# Altium PCB control-lcd.PcbDoc
Units mil, origin at the board's own origin, x right, y up, seen from the top; angles counter-clockwise.
Board outline 3313 x 2255 mil, 2 copper layers (Top Layer, Bottom Layer); 62 components, 66 nets, 308 pads, 238 vias.
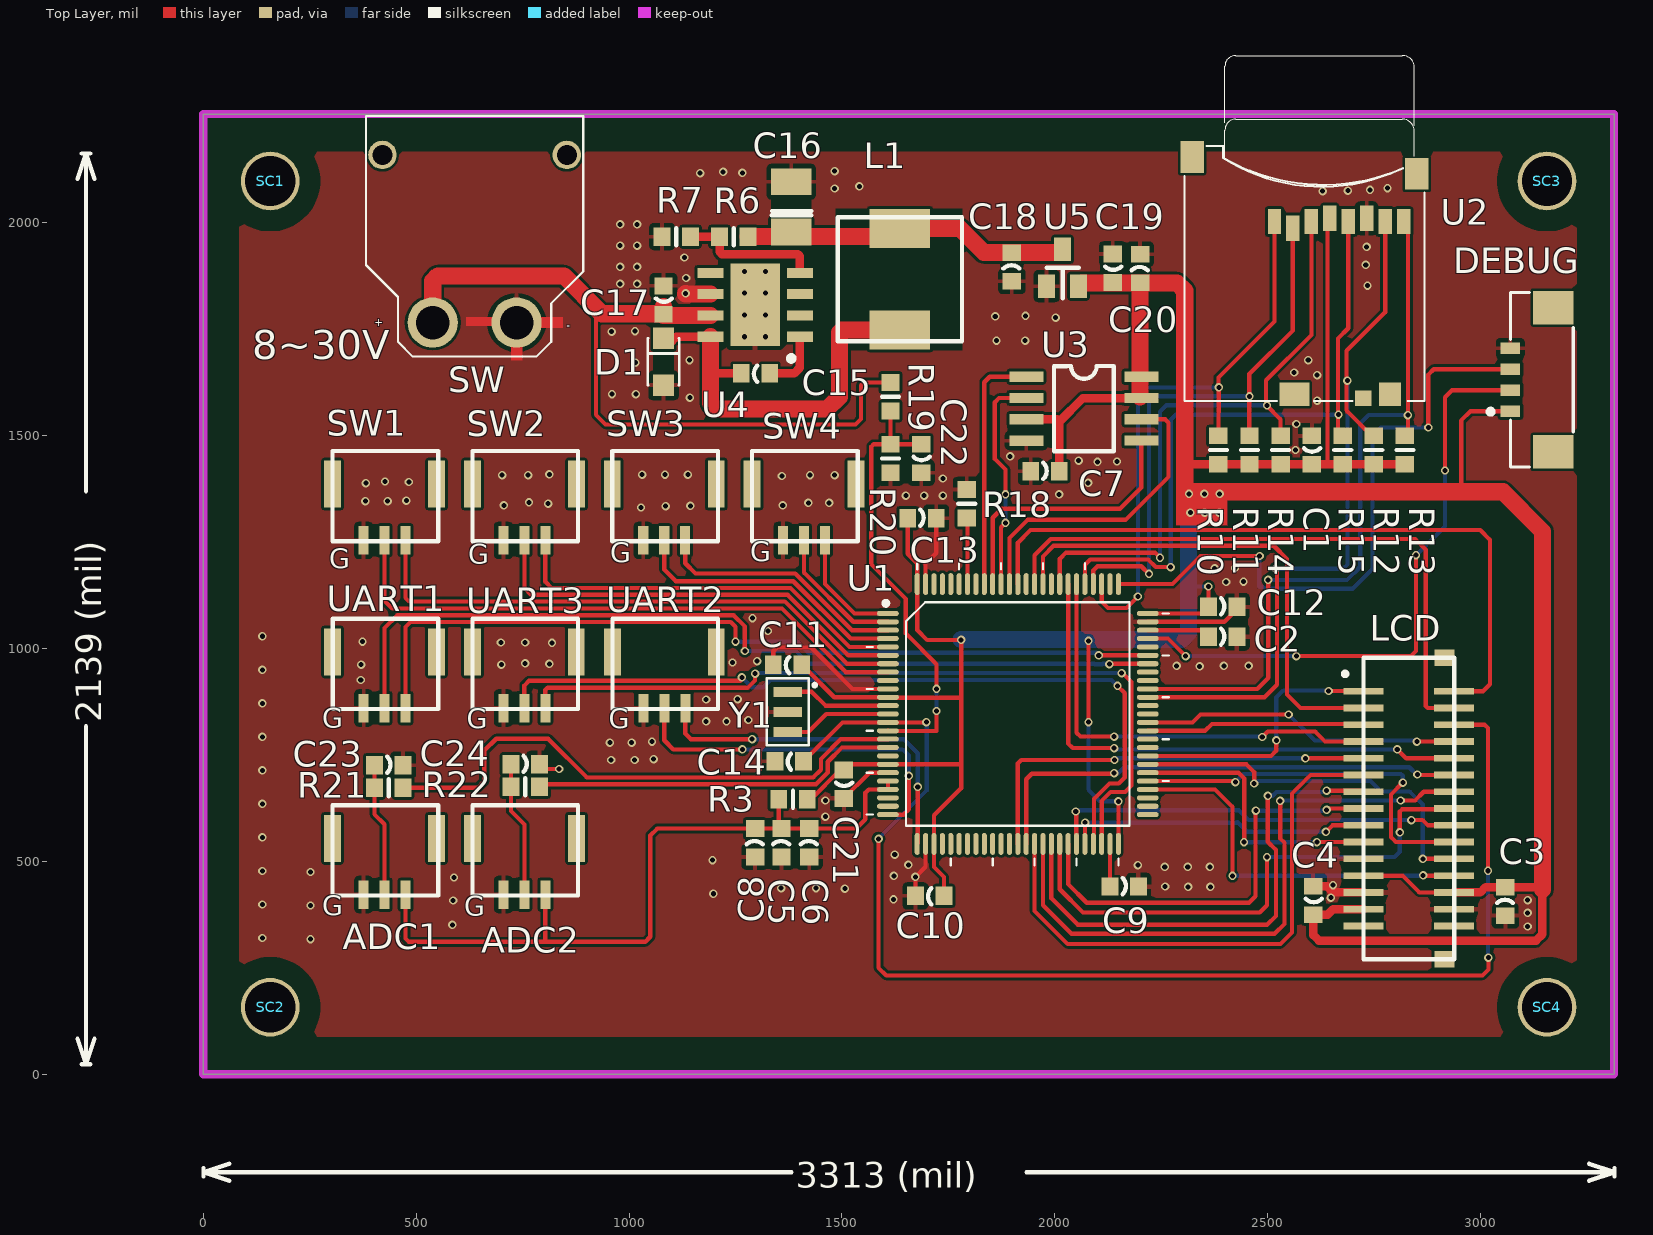
[diagram p0: Top Layer view]
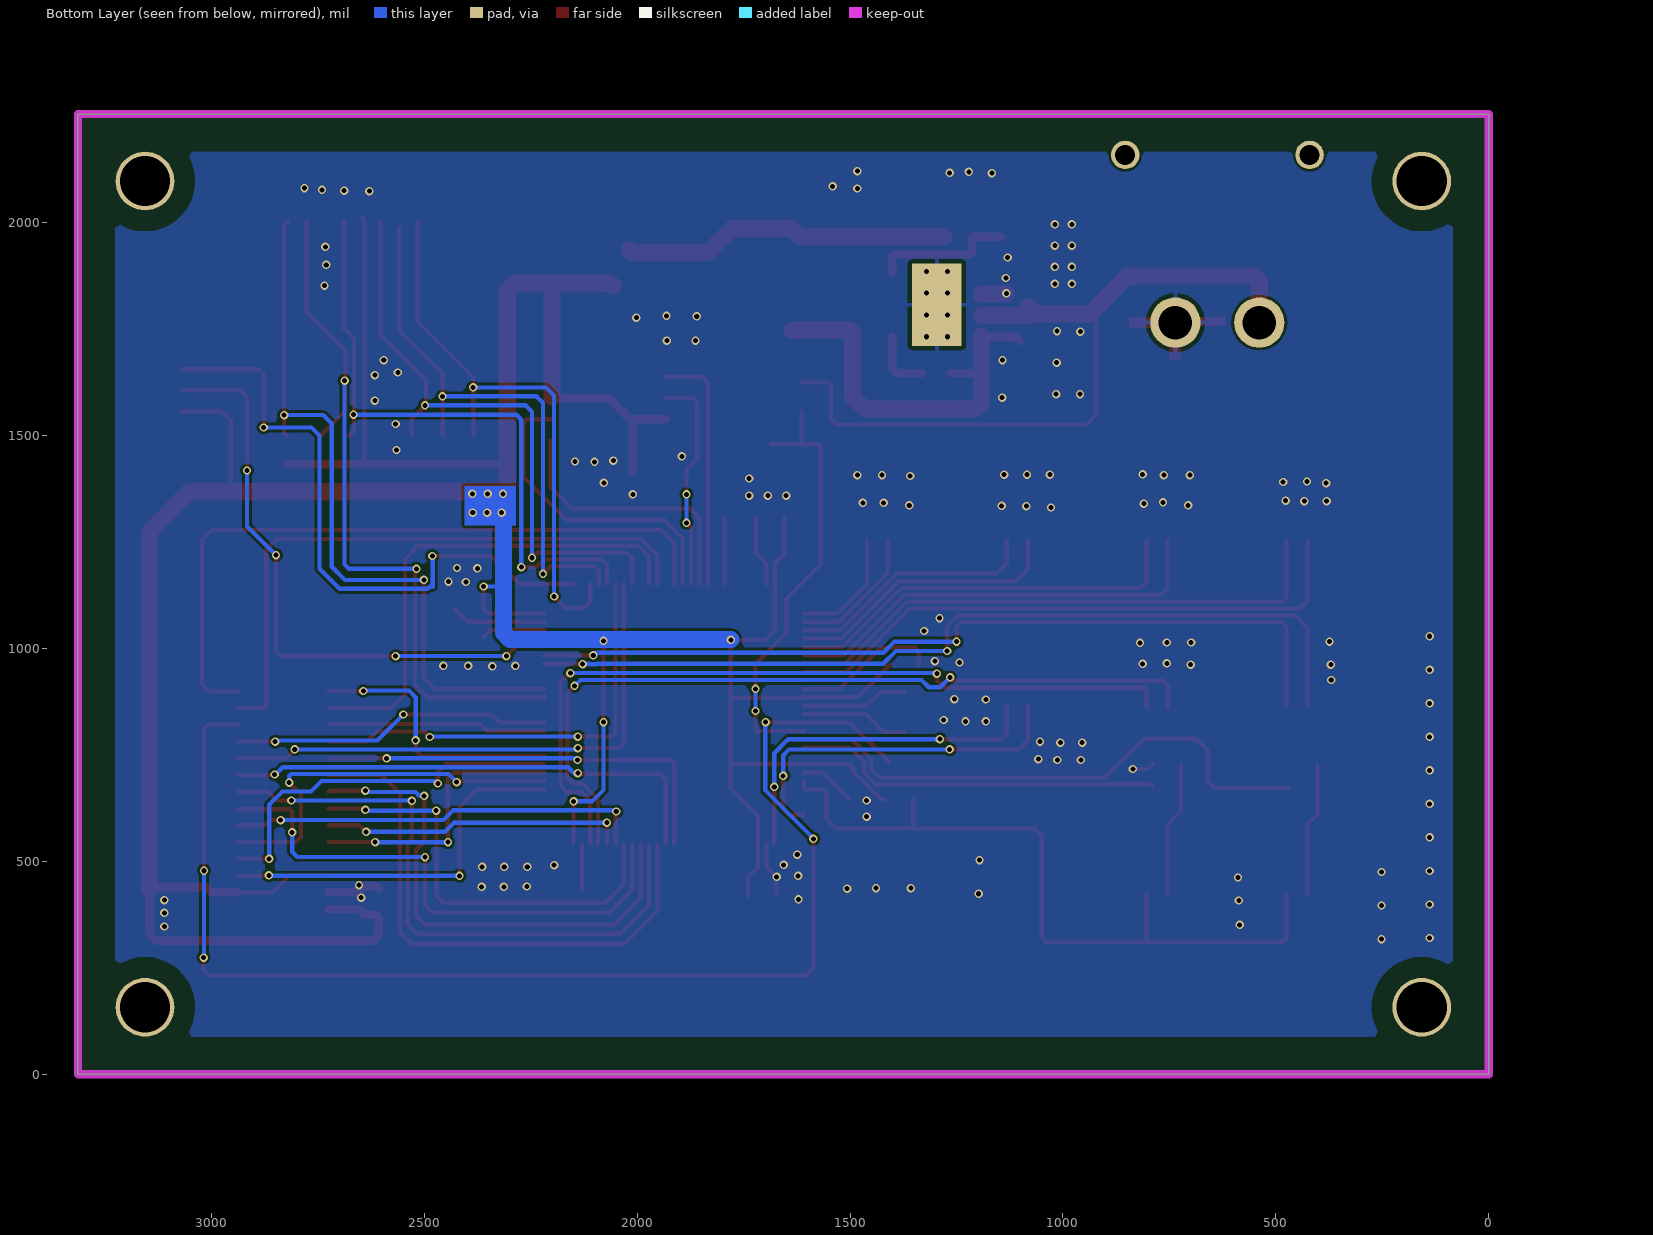
[diagram p1: Bottom Layer view, seen from below]

## Layer stack, top to bottom
Top Solder: solder mask 0.4, Solder Resist, Dk 3.5
Top Layer: signal copper 1.4
Dielectric 1: dielectric 12.6, FR-4, Dk 4.8
Bottom Layer: signal copper 1.4
Bottom Solder: solder mask 0.4, Solder Resist, Dk 3.5

## Board outline
0,0 3313,0 3313,2255 0,2255

## Design rules (kind name [scope] priority, off if disabled: settings)
Clearance [All] p1: gap=6 ignorepadtopadclearanceinfootprint=FALSE
ComponentClearance [All] p1: gap=0 collisioncheckmode=3 verticalgap=0 showdistances=FALSE
HoleToHoleClearance [All] p1: gap=0 allowstackedmicrovias=TRUE
MinimumSolderMaskSliver [All] p1: minsoldermaskwidth=0
PolygonConnect PolygonConnect_1 [All vs IsVia] p1: connectstyle=Direct reliefconductorwidth=10 reliefentries=4 polygonreliefangle="90 Angle" airgapwidth=10
PolygonConnect [All] p2: connectstyle=Relief reliefconductorwidth=10 reliefentries=4 polygonreliefangle="90 Angle" airgapwidth=10
RoutingVias [All] p1: holewidth=28 width=50 viastyle="Through Hole" minholewidth=11.81 minwidth=19.68 maxholewidth=28 maxwidth=50
SilkToSilkClearance [All] p1: silktosilkclearance=0
SilkToSolderMaskClearance [IsPad] p1: minsilkscreentomaskgap=0 clearancetoexposedcopper=TRUE
SolderMaskExpansion [All] p1: expansion=4
Width [All] p1: maxlimit=60 minlimit=6 preferedwidth=15
25 further rules are at their usual default settings.

## Components (designator, comment, footprint, x,y, rotation, side; value= is the part's Value field where it differs from the comment)
ADC1 "Header 3" 3PJST1.25 548,554 r180 top
ADC2 "Header 3" 3PJST1.25 876.35,554 r180 top
C1 "100n" C0603 2603,1466 r90 top
C2 "225" C0603 2394,1027 r180 top
C3 "100n" C0603 3058,406 r270 top
C4 "100n" C0603 2607,408 r90 top
C5 "100n" C0603 1358,544 r270 top
C6 "10uf" C0603 1423,544 r270 top
C7 "100n" C0603 1977,1416 r180 top
C8 "225" C0603 1296,544 r270 top
C9 "225" C0603 2163,441 r180 top
C10 "100n" C0603 1706,419 r0 top
C11 "100n" C0603 1372,962 r0 top
C12 "100n" C0603 2394,1098 r180 top
C13 "100n" C0603 1688,1306 r180 top
C14 "100n" C0603 1376.54,735 r0 top
C15 "100n" C0603 1297,1646 r0 top
C16 "220u/20V" SMC_B 1381,2037 r90 top
C17 "10uf" C0603 1081,1818 r90 top
C18 "100n" C0603 1899,1896 r270 top
C19 "100n" C0603 2136,1893 r90 top
C20 "10UF" C0603 2200,1892 r270 top
C21 "100n" C0603 1504,681 r90 top
C22 "0.1uF" C0603 1686,1446 r90 top
C23 "0.1uF" C0603 436,726 r180 top
C24 "0.1uF" C0603 756,728 r180 top
D1 "PMEG3010ER" "SOD123W-DIODE - AK" 1081,1673 r90 top
DEBUG "CON4" DF13-1.25-4A 3120,1631 r90 top
L1 "18uH" L7_7_4 1636,1867 r90 top
LCD "Header 15X2A" DIP1.0X30 2725,899.59 r270 top locked
R3 "10R" R0603 1385,646 r0 top
R6 "10k" R0603 1246,1967 r0 top
R7 "3.24k" R0603 1111,1967 r180 top
R10 "4.7K" R0603 2384,1466 r270 top
R11 "4.7K" R0603 2457,1466 r270 top
R12 "4.7K" R0603 2749,1466 r270 top
R13 "4.7K" R0603 2822,1466 r270 top
R14 "4.7K" R0603 2530,1466 r270 top
R15 "4.7K" R0603 2676,1466 r270 top
R18 "4.7K" R0603 1793,1340 r90 top
R19 "10K" R0603 1614,1591 r270 top
R20 "10K" R0603 1614,1446 r270 top value=1K
R21 "10K" R0603 436,673 r180 top value=100R
R22 "10K" R0603 756,675 r180 top value=100R
SC1 "M3" SCRREW_M3#1 132,2083 r0 top
SC2 "M3" SCRREW_M3#2 125,109 r0 top
SC3 "M3" SCRREW_M3#3 3190,2081 r0 top
SC4 "M3" SCRREW_M3#4 3169,157.48 r0 top
SW "TX30" TX30-m 637.46,1765.3 r0 top locked
SW1 "Header 3" 3PJST1.25 548,1385.89 r180 top
SW2 "Header 3" 3PJST1.25 876.35,1385.89 r180 top
SW3 "Header 3" 3PJST1.25 1204.7,1385.89 r180 top
SW4 "Header 3" 3PJST1.25 1533.05,1385.89 r180 top
U1 "STM32F407_100P" ST_LQFP100 1913,846 r0 top locked
U2 "microSD" MICROSD1 2586.21,1870.79 r0 top
U3 "W25Q128" SOIC-8 1933,1638.06 r0 top
U4 "TPS5430DDA" SOIC 1296,1807 r180 top
U5 "3.3V" SOT23 2018,1894 r0 top
UART1 "Header 3" 3PJST1.25 548.05,991.89 r180 top
UART2 "Header 3" 3PJST1.25 1205.05,991.89 r180 top
UART3 "Header 3" 3PJST1.25 876.26,991.89 r180 top
Y1 "CSTCE8M00G55R0" CRYSMD3.2X1.3 1373,851 r270 top

## Footprints (in the part's own frame and the unit in brackets; to place one, negate y for a bottom-side part, rotate by r counter-clockwise, add the part's x,y. Pads: shape width x height; smd on the part's side, far side on the other; paste and mask are expansions set on the pad)
3PJST1.25 [mm]
  rect 1x2.8 smd: 0(0,0) 0(6.2,0)
  rect 0.6x1.7 smd: 1(1.85,3.35) 2(3.1,3.35) 3(4.35,3.35)
  silkscreen extent -0.1,-1.98 6.2,3.4
C0603 [mm] "C0603"
  rect 1x1.1 smd: 1(-0.85,0) 2(0.85,0)
  Top Layer pour cut-out: -0.356,0.533 -0.356,-0.533 0.356,-0.533 0.356,0.533
  silkscreen extent -0.1,-0.51 0.1,0.46
CRYSMD3.2X1.3 [mm]
  rect 0.6x1.7 smd: 1(-1.2,0) 2(0,0) 3(1.2,0)
  Top Layer pour cut-out: -2.007,1.245 -0.381,1.245 -0.381,-1.27 -2.007,-1.27
  Top Layer pour cut-out: 1.981,1.245 0.406,1.245 0.406,-1.245 1.956,-1.245 1.981,-1.219
  silkscreen extent -2,-1.25 2,1.7
DF13-1.25-4A [mm] "佳能"
  rect 0.7x1.18 smd: 1(-1.875,1.28) 2(-0.625,1.28) 3(0.625,1.28) 4(1.875,1.28)
  rect 2x2.4 smd: NC(-4.3,-1.28) NC(4.3,-1.28)
  silkscreen extent -5.21,-2.48 5.21,2.61
DIP1.0X30 [mm]
  rect 0.4x2.4 smd: 1(0,5.39) 2(1,5.39) 3(2,5.39) 4(3,5.39) 5(4,5.39) 6(5,5.39) 7(6,5.39) 8(7,5.39) 9(8,5.39) 10(9,5.39) 11(10,5.39) 12(11,5.39) 13(12,5.39) 14(13,5.39) 15(14,5.39) 16(0,0) 17(1,0) 18(2,0) 19(3,0) 20(4,0) 21(5,0) 22(6,0) 23(7,0) 24(8,0) 25(9,0) 26(10,0) 27(11,0) 28(12,0) 29(13,0) 30(14,0)
  rect 1x1.2 smd: ""(-2,4.816) ""(15.985,4.816)
  Top Layer pour cut-out: -1.88,5.309 -1.88,0.14 -1.968,0.051 10.884,0.051 10.884,5.283 10.858,5.309
  silkscreen extent -2,-1.23 15.98,5.4
L7_7_4 [mm]
  rect 2.35x3.6 smd: 1(3.025,0) 2(-3.025,0)
  Top Layer pour cut-out: -4.242,3.835 -4.242,-3.708 4.216,-3.708 4.216,3.835
  silkscreen extent -3.7,-3.7 3.7,3.7
MICROSD1 [mm]
  rect 0.8x1.5 smd: 1(-1.79,3.346) 2(-0.69,2.946) 3(0.41,3.346) 4(1.51,3.545) 5(2.61,3.346) 6(3.71,3.545) 7(4.81,3.346) 8(5.91,3.346)
  rect 1.4x1.9 smd: NC(-6.7,7.195) NC3(6.7,6.195)
  rect 1.8x1.4 smd: NC1(-0.6,-6.954)
  rect 1x0.9 smd: NC2(3.497,-7.195)
  rect 1.3x1.4 smd: NC2(5.1,-6.954)
  silkscreen extent -7.15,-7.35 7.15,13.25
R0603 [mm] "R0603"
  rect 1x1.1 smd: 1(-0.85,0) 2(0.85,0)
  Top Layer pour cut-out: -0.356,0.533 -0.356,-0.533 0.356,-0.533 0.356,0.533
  silkscreen extent 0,-0.51 0,0.51
SCRREW_M3#1 [mm]
  round 3.5 hole 3: 0(0.647,0.369)
SCRREW_M3#2 [mm]
  round 3.5 hole 3: 0(0.825,1.231)
SCRREW_M3#3 [mm]
  round 3.5 hole 3: 0(-0.876,0.42)
SCRREW_M3#4 [mm]
  round 3.5 hole 3: 0(-0.343,0)
SMC_B [mil] "SMC_B"
  rect 62.99x94.49 smd: +(-59.06,0) -(59.06,0)
  Top Layer pour cut-out: -28,47 -28,-47 28,-47 28,47
  silkscreen extent -20,-48 -10,46
"SOD123W-DIODE - AK" [mil] "SOD123W-DIODE"
  rect 50x50 smd: A(-55.12,0) K(55.12,0)
  Top Layer pour cut-out: -30,25 -30,-25 30,-25 30,25
  silkscreen extent -55,-37 55,37
SOIC [mm]
  rect 1.55x0.6 smd: 1(-2.667,1.905) 2(-2.667,0.635) 3(-2.667,-0.635) 4(-2.667,-1.905) 5(2.667,-1.905) 6(2.667,-0.635) 7(2.667,0.635) 8(2.667,1.905)
  rect 2.95x4.9 smd: 9(0,0)
  rect 2.95x4.9 smd far side: 9(0,0)
  silkscreen extent -2.29,3.07 -2.03,3.33
SOIC-8 [mil]
  rect 80x24 smd: 1(0,0) 2(0,-50.06) 3(0,-100.06) 4(0,-150.06) 5(270,-150) 6(270,-100) 7(270,-50) 8(270,0)
  silkscreen extent 65,-175 205,25
SOT23 [mm] "SOT23"
  rect 1x1.4 smd: 1(-0.95,-1.1) 2(0.95,-1.1) 3(0,1.1)
  silkscreen extent -0.94,-1.82 0.97,0
ST_LQFP100 [mm]
  oval 1.3x0.3 smd: 1(-7.75,6) 2(-7.75,5.5) 3(-7.75,5) 4(-7.75,4.5) 5(-7.75,4) 6(-7.75,3.5) 7(-7.75,3) 8(-7.75,2.5) 9(-7.75,2) 10(-7.75,1.5) 11(-7.75,1) 12(-7.75,0.5) 13(-7.75,0) 14(-7.75,-0.5) 15(-7.75,-1) 16(-7.75,-1.5) 17(-7.75,-2) 18(-7.75,-2.5) 19(-7.75,-3) 20(-7.75,-3.5) 21(-7.75,-4) 22(-7.75,-4.5) 23(-7.75,-5) 24(-7.75,-5.5) 25(-7.75,-6) 51(7.75,-6) 52(7.75,-5.5) 53(7.75,-5) 54(7.75,-4.5) 55(7.75,-4) 56(7.75,-3.5) 57(7.75,-3) 58(7.75,-2.5) 59(7.75,-2) 60(7.75,-1.5) 61(7.75,-1) 62(7.75,-0.5) 63(7.75,0) 64(7.75,0.5) 65(7.75,1) 66(7.75,1.5) 67(7.75,2) 68(7.75,2.5) 69(7.75,3) 70(7.75,3.5) 71(7.75,4) 72(7.75,4.5) 73(7.75,5) 74(7.75,5.5) 75(7.75,6)
  oval 0.3x1.3 smd: 26(-6,-7.75) 27(-5.5,-7.75) 28(-5,-7.75) 29(-4.5,-7.75) 30(-4,-7.75) 31(-3.5,-7.75) 32(-3,-7.75) 33(-2.5,-7.75) 34(-2,-7.75) 35(-1.5,-7.75) 36(-1,-7.75) 37(-0.5,-7.75) 38(0,-7.75) 39(0.5,-7.75) 40(1,-7.75) 41(1.5,-7.75) 42(2,-7.75) 43(2.5,-7.75) 44(3,-7.75) 45(3.5,-7.75) 46(4,-7.75) 47(4.5,-7.75) 48(5,-7.75) 49(5.5,-7.75) 50(6,-7.75) 76(6,7.75) 77(5.5,7.75) 78(5,7.75) 79(4.5,7.75) 80(4,7.75) 81(3.5,7.75) 82(3,7.75) 83(2.5,7.75) 84(2,7.75) 85(1.5,7.75) 86(1,7.75) 87(0.5,7.75) 88(0,7.75) 89(-0.5,7.75) 90(-1,7.75) 91(-1.5,7.75) 92(-2,7.75) 93(-2.5,7.75) 94(-3,7.75) 95(-3.5,7.75) 96(-4,7.75) 97(-4.5,7.75) 98(-5,7.75) 99(-5.5,7.75) 100(-6,7.75)
  silkscreen extent -9.02,-9.02 9.02,9.02
TX30-m [mm]
  round 1.7 hole 1.2: 0(-5.5,10) 0(5.5,10)
  round 3 hole 2: 1(-2.5,0) 2(2.5,0)
  silkscreen extent -6.48,-2.03 6.48,12.32

## Part data
ADC1 ADC2 SW1 SW2 SW3 SW4 UART1 UART2 UART3: "Header, 3-Pin", LatestRevisionDate=17-Jul-2002, LatestRevisionNote="Re-released for DXP Platform.", Publisher="Altium Limited"
C1 C3 C4 C5 C6 C7 C10 C11 C12 C13 C14 C15 C17 C18 C19 C21: library part C-EUC0603, "CAPACITOR, European symbol"
C2 C8 C9: library part C
C16: library part CPOL-EUSMCB, "POLARIZED CAPACITOR, European symbol", +=+
C20 C22 C23 C24: library part Cap, "Capacitor", LatestRevisionDate=17-Jul-2002, LatestRevisionNote="Re-released for DXP Platform.", PackageReference=RAD-0.3, Published=8-Jun-2000, Publisher="Altium Limited"
D1: library part DIODE-SCHOTTKYSOD123-W
L1: library part L-EU_L0603
LCD: "Header, 15-Pin, Dual row", LatestRevisionDate=17-Jul-2002, LatestRevisionNote="Re-released for DXP Platform.", Publisher="Altium Limited"
R3: library part R
R6 R7 R10 R11 R12 R13 R14 R15 R18: library part R-EU_R0603, "RESISTOR, European symbol"
R19 R20 R21 R22: library part Res2, "Resistor", LatestRevisionDate=17-Jul-2002, LatestRevisionNote="Re-released for DXP Platform.", PackageReference=AXIAL-0.4, Published=8-Jun-2000, Publisher="Altium Limited"
SC1 SC2 SC3 SC4: library part Screw_M3, "Screw"
SW: library part "Header 2", "Header, 2-Pin", LatestRevisionDate=17-Jul-2002, LatestRevisionNote="Re-released for DXP Platform.", Publisher="Altium Limited"
U3: library part W25X16, "W25X16;SST25VF016;MX25L1605"
U5: library part XC6206
Y1: library part XTAL-3

## Via types
v1: diameter 19.68, hole 11.81, Top Layer to Bottom Layer, tented both sides, 238 vias

## Nets (pads, with @x,y where several pads share a name; then routed paths per layer and width w, separated by ;. In a path a pad name is that pad's centre, name@x,y a point inside that pad or via, vN(x,y) a via of type N, cw(c..) or ccw(c..) an arc to the next point about the centre after c; other vN are vias at no path point)
ADC1: R21.1 U1.16 | length 1318
  Top Layer w10: R21.1 645,673 660,688 660,760 688,788 810,788 901,697 1432.37,697 1450.64,715.27 1450.64,740.63 1496.96,786.95 U1.16
ADC2: R22.1 U1.17 | length 871.5
  Top Layer w10: R22.1 795.46,681 1439,681 1466.64,708.64 1466.64,734 1499.9,767.26 U1.17
ADC_C: C22.2 R19.2 R20.1 U1.15 | length 1039.9
  Top Layer w10: U1.15 1608.35,806.16 1721.84,806.16 1722,806.31 v1(1722,853) ; R20.1 1574.46,1479.46 1569,1474 1569,1197 1650,1116 1650,1035 1722,963 v1(1722,905) ; R19.2 1614,1484.46 1619,1479.46 C22.2
  Bottom Layer w10: v1(1722,853) v1(1722,905)
F_CS: U1.92 U3.1 | length 578.2
  Top Layer w10: U1.92 1834.26,1625.26 1847.06,1638.06 U3.1
FSMC_A16: LCD.16 U1.58 | length 644.2
  Top Layer w10: U1.58 2507.58,747.58 2520,760 v1(2520,784) ; v1(2643,900) 2724.59,900 LCD.16
  Bottom Layer w10: v1(2520,784) 2520,885 2536,901 2642,901 v1(2643,900)
FSMC_D0: LCD.18 U1.61 | length 514.4
  Top Layer w10: U1.61 2352.63,806.63 2368.84,822.84 2723.01,822.84 LCD.18
FSMC_D1: LCD.4 U1.62 | length 752.3
  Top Layer w10: U1.62 2323.32,826.32 2342,845 v1(2549,845) ; v1(2850,781) 2850.48,781.48 LCD.4
  Bottom Layer w10: v1(2549,845) 2610.16,783.84 v1@2850,783.84
FSMC_D2: LCD.19 U1.81 | length 1041.9
  Top Layer w10: U1.81 2050.8,802.2 2060,793 v1(2139,793) ; v1(2487,792) 2499.84,804.84 2611.16,804.84 2634.52,781.48 LCD.19
  Bottom Layer w10: v1(2139,793) v1@2487,793
FSMC_D3: LCD.5 U1.82 | length 1294.7
  Top Layer w10: U1.82 2031.11,776.89 2042,766 v1(2139,766) ; v1(2804,763) 2824.89,742.11 LCD.5
  Bottom Layer w10: v1(2139,766) 2142,763 v1(2804,763)
FSMC_D4: LCD.20 U1.38 | length 1009.1
  Top Layer w10: U1.38 1913,730 1921,738 v1(2140,738) v1@2143,738 ; v1(2588,742) 2702.89,742 2703,742.11 LCD.20
  Bottom Layer w10: v1(2140,738) 2144,742 v1(2588,742)
FSMC_D5: LCD.6 U1.39 | length 1184.7
  Top Layer w10: U1.39 1932.69,692.69 1945.84,705.84 2143.16,705.84 2142,707 v1(2139,707) ; v1(2851,704) 2852.26,702.74 LCD.6
  Bottom Layer w10: v1(2139,707) 2148,707 2162,721 2832,721 2850,703 v1(2851,704)
FSMC_D6: LCD.21 U1.40 | length 1317.8
  Top Layer w10: U1.40 1952.37,383.63 2030,306 2530,306 2556.74,332.74 2556.74,659.48 2600,702.74 LCD.21
FSMC_D7: LCD.7 U1.41 | length 1458.3
  Top Layer w10: U1.41 1972.06,396.94 2039,330 2516,330 2539,353 2539,544 2529,554 v1(2529,642) ; v1(2812,643) 2846,643 2866.37,663.37 LCD.7
  Bottom Layer w10: v1(2529,642) 2530,643 v1(2812,643)
FSMC_D8: LCD.22 U1.42 | length 1239.8
  Top Layer w10: U1.42 1991.74,413.26 2054,351 2498,351 2519,372 2519,527 ; v1(2500,654) 2500,546 ; v1(2638,666) 2722.37,666 LCD.22 ; 2500,546 2519,527 ; 2500,546 2519,527
  Bottom Layer w10: v1(2500,654) 2511.52,654 2520.37,662.84 2635.84,662.84 2637,664 2638,663 v1(2638,666)
FSMC_D9: LCD.8 U1.43 | length 1277.6
  Top Layer w10: U1.43 2011.43,434.57 2066,380 2481,380 2498,397 v1(2498,510) ; v1(2810,568) 2810,617 2815.16,622.16 2935.35,622.16 LCD.8
  Bottom Layer w10: v1(2498,510) 2798,510 2810,522 v1(2810,568)
FSMC_D10: LCD.23 U1.44 | length 1017.3
  Top Layer w10: U1.44 2031.11,446.89 2075,403 2456,403 2471,418 v1@2471,622 ; v1(2638,621) 2641,624 LCD.23
  Bottom Layer w10: v1(2472,619) 2636,619 v1(2638,621)
FSMC_D11: LCD.9 U1.45 | length 987.1
  Top Layer w10: v1(2049,617) v1@2051,617 ; v1@2050.16,617 2050.16,541.52 U1.45 ; v1(2837,597) 2863.63,597 2876,584.63 LCD.9
  Bottom Layer w10: v1(2049,617) 2049,617.69 2046.84,619.84 2432.16,619.84 2455,597 v1(2837,597)
FSMC_D12: LCD.24 U1.46 | length 716.6
  Top Layer w10: U1.46 v1@2070.48,587.48 ; v1(2636.52,569.48) 2651.67,584.63 LCD.24
  Bottom Layer w10: v1(2071,591) 2428,591 2429,592 2451.52,569.48 v1(2636.52,569.48)
FSMC_D13: LCD.10 U1.55 | length 918
  Top Layer w10: U1.55 2421.48,688.52 v1(2424,686) ; v1(2817,685) 2789.16,657.16 2789.16,556.84 2800.74,545.26 LCD.10
  Bottom Layer w10: v1(2424,686) 2443,705 2813,705 2817,701 v1(2817,685)
FSMC_D14: LCD.25 U1.56 | length 663.1
  Top Layer w10: U1.56 2431.27,708.21 2444.84,694.63 2444.84,545.84 v1(2444,545) ; v1@2615.26,545.26 LCD.25
  Bottom Layer w10: v1(2444,545) v1(2615,545)
FSMC_D15: LCD.11 U1.57 | length 904.5
  Top Layer w10: U1.57@2220.12,727.89 2450,727.89 2468,709.89 v1(2468,683) ; v1(2864,506) 2937.09,506 LCD.11
  Bottom Layer w10: v1(2468,683) 2474,689 2741,689 2766,664 2766.16,664.16 2833.16,664.16 2864,633.31 v1(2864,506)
FSMC_NE1: LCD.1 U1.88 | length 1658.4
  Top Layer w10: U1.88 1913,1248 1943,1278 2999,1278 3022,1255 3022,916 3005.59,899.59 LCD.1
FSMC_NOE: LCD.17 U1.85 | length 1172.2
  Top Layer w10: U1.85 1972.06,1216.06 1997,1241 2514,1241 2545,1210 2545,892 2576.78,860.22 LCD.17
FSMC_NWE: LCD.2 U1.86 | length 1447.8
  Top Layer w10: U1.86 1952.37,1219 1990.37,1257 2846,1257 2871,1232 2871,865 2875.78,860.22 LCD.2
GND: ADC1.3 ADC2.3 C1.2 C2.1 C3.2 C4.2 C5.2 C6.2 C7.2 C8.2 C9.1 C10.1 C11.1 C12.1 C13.1 C14.1 C16.- C17.2 C18.2 C19.2 C20.1 C21.1 C22.1 C23.1 C24.1 D1.A DEBUG.4 LCD.14 LCD.26 LCD.28 R7.2 R18.2 R20.2 SW1.3 SW2.3 SW3.3 SW4.3 SW.2 U1.10 U1.20 U1.27 U1.74 U1.99 U2.6 U3.4 U4.6 U4.9 U5.1 UART1.3 UART2.3 UART3.3 Y1.2 | length 1230.5
  Top Layer w10: C24.1 800.46,717 v1(836,717) ; C11.1 1338.54,993.54 1347,1002 1428,1002 1524.94,905.06 U1.10 ; C21.1 1564.67,708.21 U1.20 ; C10.1 v1(1672.54,463.54) 1696.47,487.47 U1.27 ; U1.99 1696.47,1199.47 1721.46,1224.46 C13.1 ; U1.74 2398,1062.54 C12.1@2427.46,1092
  Top Layer w20: C4.2@2607,435.46 2613,441.46 2639.54,441.46 2653.85,427.15 LCD.28
  Top Layer w40: v1(1133,1834) 1134,1833 1133,1832 U4.6
  other v1: 252,317.52 139,320 3110,347 585,351 3110,379 252,396.26 139,398.74 587,408 3110,409 1621,411 2648,415 1198,424 1507,436 1357,437 1439,437 2313,440 2365,440 2259,441 2653,444 589,462 1622,466 252,475 139,477.48 2258,487 2312,487 2364,487 2195,491 1656,492 1196,503 1624,516 139,556.22 1461,605 139,634.96 1461,643 139,713.7 958,738 1013,738 1058,740 955,779 1006,779 1054,781 139,792.44 1181,829 1229,829 1280,832 139,871.18 1181,880 1255,881 370,926 139,949.92 2340,958 2286,959 2397,959 2455,959 371,962 700,962 813,964 756,965 1243,967 1301,970 819,1013 699,1014 756,1014 374,1016 139,1028.66 1326,1041 1290,1071 2402,1156 2443,1157 2375,1188 2423,1189 1028,1331 1086,1334 1144,1335 706,1336 1361,1336 810,1340 1421,1342 1470,1342 765,1343 381,1346 433,1346 477,1347 1650,1359 1693,1359 1737,1359 2010,1362 382,1388 2078,1389 483,1391 427,1392 1737,1399 1359,1405 702,1407 763,1407 1425,1407 1483,1407 1031,1408 1084.5,1408 1138,1408 813,1409 2100,1438 2146,1439 2056,1441 1895,1451 2565,1466 2567,1527 2616,1582 1143,1589 960,1597 1016,1597 2616,1642 2562,1648 1015,1671 1142,1677 2595,1677 1863,1723 1930,1723 1271,1732 1321,1732 959,1744 1014,1745 2002,1777 1860,1780 1931,1781 1271,1783.18 1321,1783.18 1271,1834.36 1321,1834.36 2734,1852 979,1856 1019,1856 1134,1870 1271,1885.54 1321,1885.54 979,1896 1019,1896 2730,1901 1130,1918 2732,1943 979,1946 1019,1946 979,1996 1019,1996 2629,2074 2688,2075 2740,2077 1483,2080 2781,2081 1541,2085 1167,2116 1266,2117 1221,2119 1483,2121
LCD_BL: LCD.12 U1.54 | length 905.6
  Top Layer w10: U1.54 2376.16,668.84 2417,628 v1(2417,466) ; v1(2865,467) 2862,467 2861.52,466.52 LCD.12
  Bottom Layer w10: v1(2417,466) 2864,466 v1(2865,467)
NetADC1_2: ADC1.2 C23.2 R21.2 | length 313.6
  Top Layer w10: C23.2 R21.2 402.54,610.46 425.95,587.05 ADC1.2
NetADC2_2: ADC2.2 C24.2 R22.2 | length 319
  Top Layer w10: C24.2 R22.2 722.54,618.46 754.3,586.7 ADC2.2
NetC2_2: C2.2 U1.73 | length 149
  Top Layer w10: U1.73 2344.69,1042.85 C2.2
NetC9_2: C9.2 U1.49 | length 109.6
  Top Layer w10: U1.49 2129.54,431.92 C9.2@2130,431.46
NetC15_1: C15.1 D1.K L1.2 U4.8 | length 928.8
  Top Layer w20: D1.K@1101.12,1722 1111.12,1732 U4.8 ; 1201,1646 C15.1
  Top Layer w40: U4.8 1191,1576 1205,1562 1465,1562 1494,1591 1494,1742 1499.91,1747.91 L1.2
NetC15_2: C15.2 U4.1 | length 148.9
  Top Layer w20: C15.2 1388,1646 1401,1659 U4.1
NetR6_1: R6.1 R7.1 U4.4 | length 335.4
  Top Layer w20: R7.1 R6.1 1212.54,1931.46 1218,1926 1396,1926 1401,1921 U4.4
NetR18_1: R18.1 U1.94 | length 155.4
  Top Layer w10: U1.94 R18.1@1794.89,1306.54
NetU1_12: U1.12 Y1.1 | length 248.4
  Top Layer w10: Y1.1 1428.76,898.24 1461.31,865.69 U1.12
NetU1_13: U1.13 Y1.3 | length 252.4
  Top Layer w10: Y1.3 1420.76,803.76 1463,846 U1.13
REST1: C14.2 LCD.3 U1.14 | length 3046.1
  Top Layer w10: C14.2 1501.32,826.32 U1.14 1697.68,826.32 1698,826.63 v1(1698,827) ; v1(1586,553) 1586,250 1604,232 3004,232 3018,246 v1(3018,274) ; LCD.3 3009.15,820.85 3017,813 v1(3017,478)
  Bottom Layer w10: v1(1586,553) 1586,553.52 1698.84,666.37 1698.84,826.16 v1(1698,827) ; v1(3017,478) 3017,275 v1(3018,274)
RX1: U1.70 UART1.1 | length 1984.8
  Top Layer w10: UART1.1@475.17,866.11 475.17,1050.17 487,1062 1239,1062 1250,1051 v1(1250,1016) ; v1(2103,984) 2103.2,983.8 2119.32,983.8 2119.37,983.84 U1.70 U1.70
  Bottom Layer w10: v1(1250,1016) 1396,1016 1422,990 2097,990 v1(2103,984)
RX2: U1.26 UART2.1 | length 847.3
  Top Layer w10: UART2.1@1131.86,867.11 1131.86,800.14 1145,787 v1(1289,787) ; U1.26 1678,542.1 v1(1678,675)
  Bottom Layer w10: v1(1289,787) 1645,787 1678,754 v1(1678,675) v1@1677,676
RX3: U1.48 UART3.1 | length 1883
  Top Layer w10: UART3.1 803.42,902.42 809,908 1279,908 1296,925 v1(1296,941) ; U1.48 2109.85,641.85 2131,663 2165,663 2180,678 2180,921 2159,942 v1(2157,942)
  Bottom Layer w10: v1@1296,940.31 1297.84,942.16 2156.84,942.16 v1(2157,942)
SDIO_CK: R15.1 U1.80 U2.5 | length 1522
  Top Layer w10: U1.80 2070.48,1196.48 2083,1209 2219,1209 2237,1191 v1(2272,1191) ; R15.1 2665,1510.46 2665,1728 2688.97,1751.97 U2.5
  Bottom Layer w10: v1(2272,1191) 2272,1537 2284,1549 v1(2666,1549)
SDIO_CMD: R14.1 U1.83 U2.3 | length 1465.2
  Top Layer w10: U1.83 2011.43,1210.43 2026,1225 2235,1225 v1(2247,1213) ; v1@2496,1572 2496,1630 2602.35,1736.35 U2.3 ; v1@2497.5,1570.5 2530,1538 R14.1
  Bottom Layer w10: v1(2247,1213) 2247,1556 2262,1571 v1(2498,1571)
SDIO_D0: R12.1 U1.65 U2.7 | length 1765.1
  Top Layer w10: U1.65 2492.37,885.37 2521.84,914.84 2521.84,1183.16 v1(2518,1187) ; R12.1 2743.54,1499.46 2686.84,1556.16 2686.84,1557.63 2685,1559.48 2685,1699 2775.58,1789.58 U2.7
  Bottom Layer w10: v1(2518,1187) 2677,1187 2687,1197 v1(2687,1629)
SDIO_D1: R13.1 U1.66 U2.8 | length 1718.9
  Top Layer w10: U1.66 2475.06,905.06 2501,931 v1(2501,1161) ; U2.8 2829,1992.4 v1(2829,1548) 2829,1506.46 R13.1
  Bottom Layer w10: v1(2501,1161) 2686,1161 2717,1192 2717,1528 2737,1548 v1(2829,1548)
SDIO_D2: R10.1 U1.78 U2.1 | length 1430.4
  Top Layer w10: U1.78 2109.85,1110.15 2125,1095 2168,1095 v1(2195,1122) ; R10.1 2384,1554 ; v1(2385,1613) 2385,1555 2384,1554 ; U2.1@2515.53,2002.51 2515.53,1767.53 2384,1636 2384,1554
  Bottom Layer w10: v1(2195,1122) 2195,1594 2214,1613 v1(2385,1613)
SDIO_D3: R11.1 U1.79 U2.2 | length 1348.3
  Top Layer w10: U1.79 2090.17,1183.17 2100,1193 2203,1193 v1(2221,1175) ; R11.1@2456.5,1499.46 2456.5,1644.5 2558.84,1746.84 U2.2@2558.84,1986.76
  Bottom Layer w10: v1(2221,1175) 2221,1577 2236,1592 v1(2457,1592)
SPI1_MISO: U1.90 U3.2 | length 519.7
  Top Layer w10: U1.90 1873.63,1284.63 v1(1884,1295) ; v1(1884,1362) 1884,1420 1859,1445 1859,1578 1869,1588 U3.2
  Bottom Layer w10: v1(1884,1295) v1(1884,1362)
SPI1_MOSI: U1.91 U3.5 | length 644.4
  Top Layer w10: U1.91 1853.95,1306.95 1875,1328 2153,1328 2203,1378 U3.5
SPI1_SCK: U1.89 U3.6 | length 735.7
  Top Layer w10: U1.89 1893.32,1259.32 1936,1302 2166,1302 2267,1403 2267,1530 2258.94,1538.06 U3.6
SW1_1: SW1.2 U1.8 | length 1393.3
  Top Layer w10: SW1.2 425.95,1112.05 444,1094 1359.24,1094 1508.81,944.43 U1.8
SW1_2: SW1.1 U1.7 | length 1332
  Top Layer w10: SW1.1 475.17,1118.83 484,1110 1365.86,1110 1511.75,964.11 U1.7
SW2_1: SW2.2 U1.6 | length 1031.3
  Top Layer w10: SW2.2 754.3,1141.7 770,1126 1372.49,1126 1514.69,983.8 U1.6
SW2_2: SW2.1 U1.5 | length 965.3
  Top Layer w10: SW2.1 803.51,1156.49 818,1142 1379.12,1142 1517.64,1003.48 U1.5
SW3_1: SW3.2 U1.4 | length 661.1
  Top Layer w10: SW3.2 1082.65,1185.35 1110,1158 1385.75,1158 1520.58,1023.17 U1.4
SW3_2: SW3.1 U1.3 | length 595
  Top Layer w10: SW3.1 1132,1253.86 1132,1200 1156,1176 1390.37,1176 1523.52,1042.85 U1.3
SW4_1: SW4.2 U1.2 | length 320.7
  Top Layer w10: SW4.2 1411,1178 1526.46,1062.54 U1.2
SW4_2: SW4.1 U1.1 | length 278.9
  Top Layer w10: SW4.1 1460.21,1151.42 1529.41,1082.22 U1.1
SWCLK: DEBUG.3 U1.76 | length 1492.5
  Top Layer w10: U1.76 2276.12,1151.12 2342,1217 v1(2481,1217) ; v1(2877,1519) 2877,1643 2889.6,1655.6 DEBUG.3
  Bottom Layer w10: v1(2481,1217) 2480.16,1216.16 2480.16,1144.84 2487.68,1144.84 2492.37,1140.16 2699.16,1140.16 2746,1187 2746,1500 2765,1519 v1(2877,1519)
SWDIO: DEBUG.2 U1.72 | length 1436.5
  Top Layer w10: U1.72 2265.83,1023.17 v1(2307,982) ; v1(2567,982) 2836,982 2848,994 v1(2848,1219) ; v1(2916,1418) 2916,1590 2932.4,1606.4 DEBUG.2
  Bottom Layer w10: v1(2307,982) v1(2567,982) ; v1(2848,1219) 2916,1287 v1(2916,1418)
TX1: U1.69 UART1.2 | length 2069
  Top Layer w10: UART1.2@425.95,866.11 425.95,1047.95 456,1078 1245.63,1078 1272,1051.63 v1(1272,994) ; v1(2128,963) 2129.11,964.11 U1.69
  Bottom Layer w10: v1(1272,994) 1392,994 1422,964 2093.52,964 2094.37,963.16 2111.63,963.16 2112.48,964 2127,964 v1(2128,963)
TX2: U1.25 UART2.2 | length 853.1
  Top Layer w10: UART2.2@1082.65,867.11 1082.65,784.35 1104,763 v1(1266,763) ; U1.25 1644.78,609.78 1657.16,622.16 1657.16,700.84 v1(1657,701)
  Bottom Layer w10: v1(1266,763) 1643,763 1657,749 v1(1657,701)
TX3: U1.47 UART3.2 | length 1899.3
  Top Layer w10: UART3.2 754.21,913.21 765,924 1261,924 1265,928 v1(1265,932) ; U1.47@2091.84,540.88 2091.84,646.84 2128.16,683.16 2150,683.16 2164,697.16 2164,895 v1(2147,912)
  Bottom Layer w10: v1(1265,932) 1288,909 1315,909 1332,926 2133,926 v1(2147,912)
VCC3.3: C1.1 C3.1 C4.1 C7.1 C10.2 C11.2 C12.2 C13.2 C19.1 C20.2 C21.2 DEBUG.1 LCD.13 LCD.27 LCD.29 R3.2 R10.2 R11.2 R12.2 R13.2 R14.2 R15.2 U1.11 U1.19 U1.28 U1.50 U1.75 U1.100 U2.4 U3.3 U3.7 U3.8 U5.2 | length 9255.5
  Top Layer w10: C11.2 1482.09,885.37 U1.11 1609.09,884.16 1778.79,884.16 1780,885.37 ; R3.2 1427,646 C21.2@1495.46,714.46 ; C21.2@1490.73,719.19 1499.43,727.89 U1.19 1778,727.89 ; C13.2 1654.54,1222.46 1676.78,1200.22 U1.100 1676.78,1043.22 1700,1020 v1(1780,1020) 1780,885.37 ; C10.2 1739.46,463.54 1716.15,486.85 U1.28 1716.15,608.15 1780,672 1780,885.37 ; v1(2079,827) v1(2079,1018) ; v1(2149,641) 2149.22,640.78 U1.50 ; U1.75 2350.76,1082.22 C12.2@2360.54,1092 ; C12.2 v1(2360.54,1145.54) ; 2640,1432.54 2640,2004.72 U2.4 ; LCD.27 2816.48,466.52 2855.85,427.15 LCD.13 ; 2954,1368 2954,1535 2976.17,1557.18 DEBUG.1
  Top Layer w20: U3.3 2005,1538 2010.46,1532.54 ; C7.1 2010.46,1532.54 ; U3.7 2065.98,1588.06 2010.46,1532.54 ; 2305,1432.54 R10.2 C1.1 2640,1432.54 R13.2@2819,1432.54 ; LCD.29 2653.78,387.78 2640.54,374.54 2613,374.54 2607,368.54 2607,327 2620,314 3130,314 3145,329 3145,434 3139.54,439.46 C3.1 3011.46,439.46 2999.15,427.15 LCD.13
  Top Layer w40: U5.2 2063.25,1858.54 C20.2 ; U3.7@2200,1591.06 C20.2 ; 3145,434 3145,1275 3052,1368 2954,1368 2306,1368 2305,1369 2305,1432.54 2305,1840 2286.46,1858.54 C20.2
  Bottom Layer w10: v1(2079,827) 2079,668 2106,641 v1(2149,641) ; v1(2079,1018) 2116,1018 2118,1020 ; 2314,1145.54 v1(2360.54,1145.54)
  Bottom Layer w40: v1@1780,1021 2116,1021 ; 2118,1021 2299,1021 2314,1036 2314,1145.54 ; 2314,1150 2314,1338
  other v1: 2318,1319 2352,1319 2386,1319 2315,1363 2351,1363 2387,1363
VCC5: C16.+ C18.1 L1.1 R6.2 U5.3 | length 772.7
  Top Layer w40: R6.2 1616.91,1967 L1.1 1776.91,1986.09 1833.54,1929.46 C18.1 2011.15,1929.46 U5.3@2018,1936.31
VCC12V: C17.1 R19.1 SW.1 U4.7 | length 1834.5
  Top Layer w10: 922.46,1786 922.46,1548.54 945,1526 1532,1526 1545,1539 1545,1618 1551.46,1624.46 R19.1
  Top Layer w40: SW.1 539.04,1863.04 551,1875 847,1875 936,1786 1081,1786 C17.1@1081,1803.54 ; C17.1@1081,1782 U4.7
VDDA: ADC1.1 ADC2.1 C5.1 C6.1 C8.1 R3.1 U1.21 U1.22 | length 1766.6
  Top Layer w10: ADC1.1 475.17,318.83 483,311 807,311 ; ADC2.1 803.51,314.49 807,311 ; R3.1 1351.54,583.92 C5.1 ; U1.21 U1.22 1562.84,668.84 1555,661 1555,599 1533.46,577.46 C6.1 C5.1 ; 807,311 1038,311 1050,323 1050,561 1066.46,577.46 C8.1 C5.1
pads on no net: ADC1.0 ADC2.0 DEBUG.NC LCD. LCD.15 LCD.30 SC1.0 SC2.0 SC3.0 SC4.0 SW1.0 SW2.0 SW3.0 SW4.0 SW.0 U1.9 U1.18 U1.23 U1.24 U1.29 U1.30 U1.31 U1.32 U1.33 U1.34 U1.35 U1.36 U1.37 U1.51 U1.52 U1.53 U1.59 U1.60 U1.63 U1.64 U1.67 U1.68 U1.71 U1.77 U1.84 U1.87 U1.93 U1.95 U1.96 U1.97 U1.98 U2.NC U2.NC1 U2.NC2 U2.NC3 U4.2 U4.3 U4.5 UART1.0 UART2.0 UART3.0

## Polygon pours and split planes (outlines as drawn)
GND on Top Layer "Top Layer-No Net" (solid, remove dead copper, pour order 0): 85,88 3225,88 3225,2166 85,2166
GND on Bottom Layer "Top Layer-No Net" (solid, remove dead copper, pour order 2): 85,88 3225,88 3225,2166 85,2166

## Keep-outs
Keep-Out Layer:
  the board outline again, w19.68

## Other copper
Top Layer:
  rectangle net GND: 755,1753 845,1778
  rectangle net GND: 617,1757 727,1778
  rectangle net GND: 723,1676 750,1762
  rectangle net VCC3.3: 2285,1289 2405,1382
  pour cut-out: 39.37,2097.52 ccw(c157.48,2097.52) 157.48,1979.41 ccw(c157.48,2097.52) 275.59,2097.52 ccw(c157.48,2097.52) 157.48,2215.63 ccw(c157.48,2097.52)
  pour cut-out: 3037.4,2097.52 ccw(c3155.51,2097.52) 3155.51,1979.41 ccw(c3155.51,2097.52) 3273.62,2097.52 ccw(c3155.51,2097.52) 3155.51,2215.63 ccw(c3155.51,2097.52)
  pour cut-out: 3037.4,157.48 ccw(c3155.51,157.48) 3155.51,39.37 ccw(c3155.51,157.48) 3273.62,157.48 ccw(c3155.51,157.48) 3155.51,275.59 ccw(c3155.51,157.48)
  pour cut-out: 39.37,157.48 ccw(c157.48,157.48) 157.48,39.37 ccw(c157.48,157.48) 275.59,157.48 ccw(c157.48,157.48) 157.48,275.59 ccw(c157.48,157.48)
Bottom Layer:
  rectangle net VCC3.3: 2285,1289 2405,1382
  pour cut-out: 39.37,2097.52 ccw(c157.48,2097.52) 157.48,1979.41 ccw(c157.48,2097.52) 275.59,2097.52 ccw(c157.48,2097.52) 157.48,2215.63 ccw(c157.48,2097.52)
  pour cut-out: 3037.4,2097.52 ccw(c3155.51,2097.52) 3155.51,1979.41 ccw(c3155.51,2097.52) 3273.62,2097.52 ccw(c3155.51,2097.52) 3155.51,2215.63 ccw(c3155.51,2097.52)
  pour cut-out: 3037.4,157.48 ccw(c3155.51,157.48) 3155.51,39.37 ccw(c3155.51,157.48) 3273.62,157.48 ccw(c3155.51,157.48) 3155.51,275.59 ccw(c3155.51,157.48)
  pour cut-out: 39.37,157.48 ccw(c157.48,157.48) 157.48,39.37 ccw(c157.48,157.48) 275.59,157.48 ccw(c157.48,157.48) 157.48,275.59 ccw(c157.48,157.48)

## Silkscreen, mask and mechanical layers (free items; w line width, h text height)
Top Overlay:
  lines w10: -295,83.58 -275,23.58 ; -295,2102.58 -275,2162.58 ; -285,23.58 -265,23.58 ; -285,2162.58 -265,2162.58 ; -275,817.17 -275,23.58 ; -275,1369 -275,2162.58 ; -255,83.58 -275,23.58 ; -255,2102.58 -275,2162.58 ; 1,-240 1,-220 ; 61,-250 1,-230 ; 61,-210 1,-230 ; 1381.58,-230 1,-230 ; 1933.42,-230 3314,-230 ; 3254,-250 3314,-230 ; 3254,-210 3314,-230 ; 3314,-240 3314,-220
  text "8~30V" at 115,1656 h118.11
  text "G" at 1285,1189 h78.74
  text "G" at 956,1187 h78.74
  text "G" at 623,1184 h78.74
  text "G" at 296,1173 h78.74
  text "2139 (mil)" at -239.01,827.17 h60 r90
  text "G" at 279,798 h78.74
  text "G" at 619,797 h78.74
  text "G" at 952,797 h78.74
  text "G" at 279,358 h78.74
  text "G" at 613,357 h78.74
  text "3313 (mil)" at 1391.58,-265.99 h60

## Text inside footprints (layer, text, board x,y; h text height)
SW: Top Overlay "+" at 422.46,1780.3 h31.5 r180; Top Overlay "-" at 862.46,1770.3 h31.5 r180